# Altium PCB Volt_Metter_PCB.PcbDoc
Units mil, origin at the board's own origin, x right, y up, seen from the top; angles counter-clockwise.
Board outline 3976.41 x 2007.9 mil, 2 copper layers (Top Layer, Bottom Layer); 22 components, 21 nets, 99 pads, 6 vias.
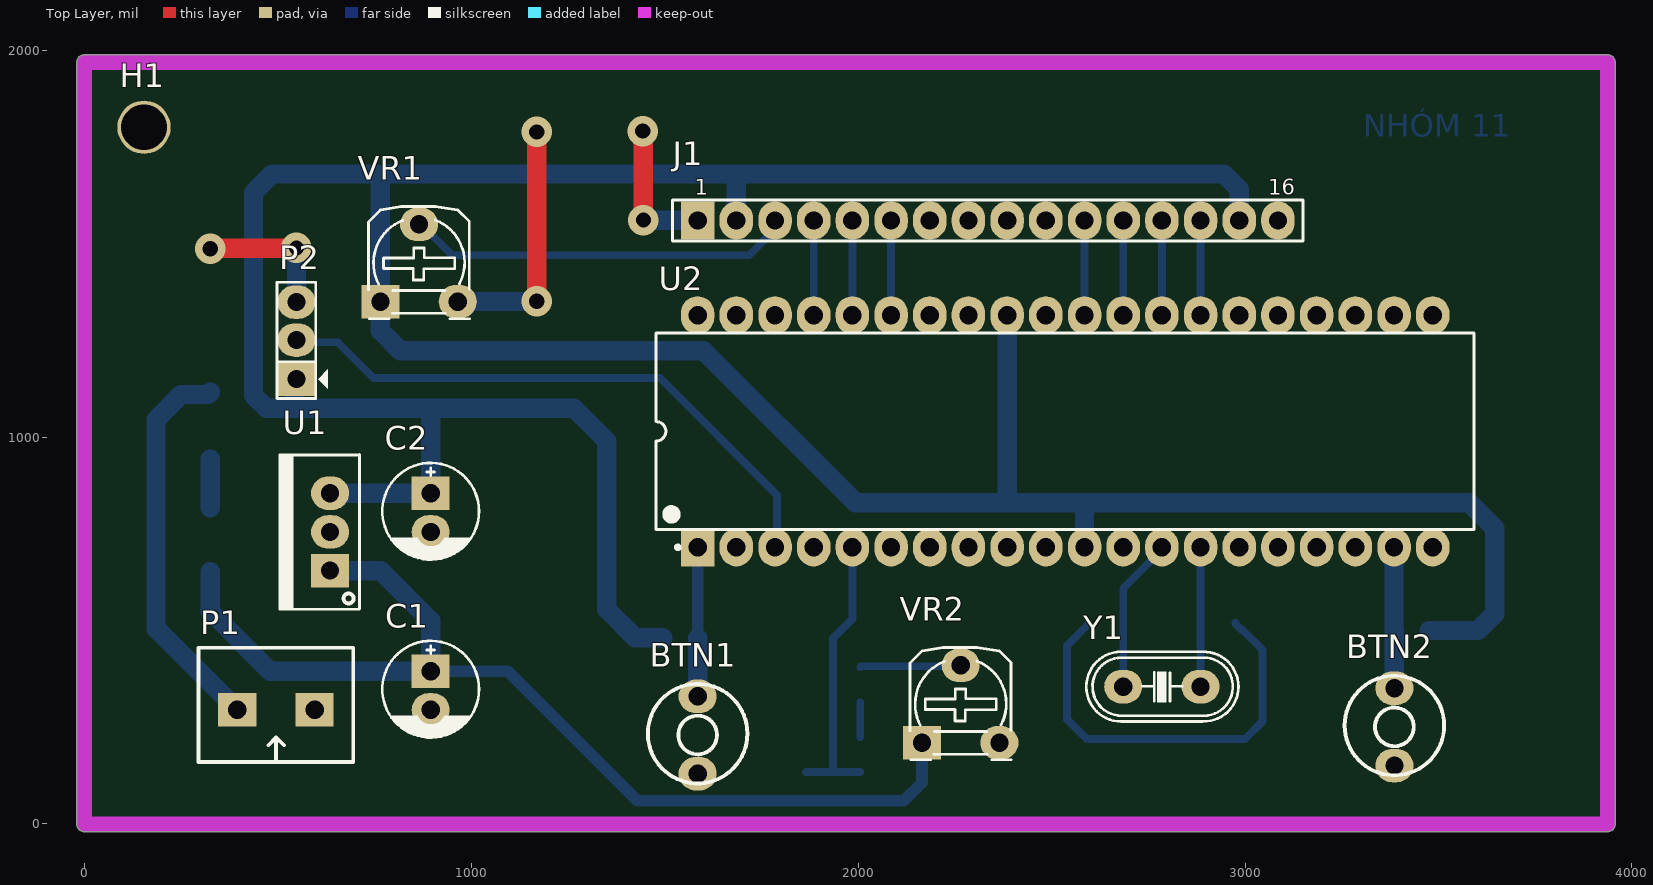
[diagram p0: Top Layer view]
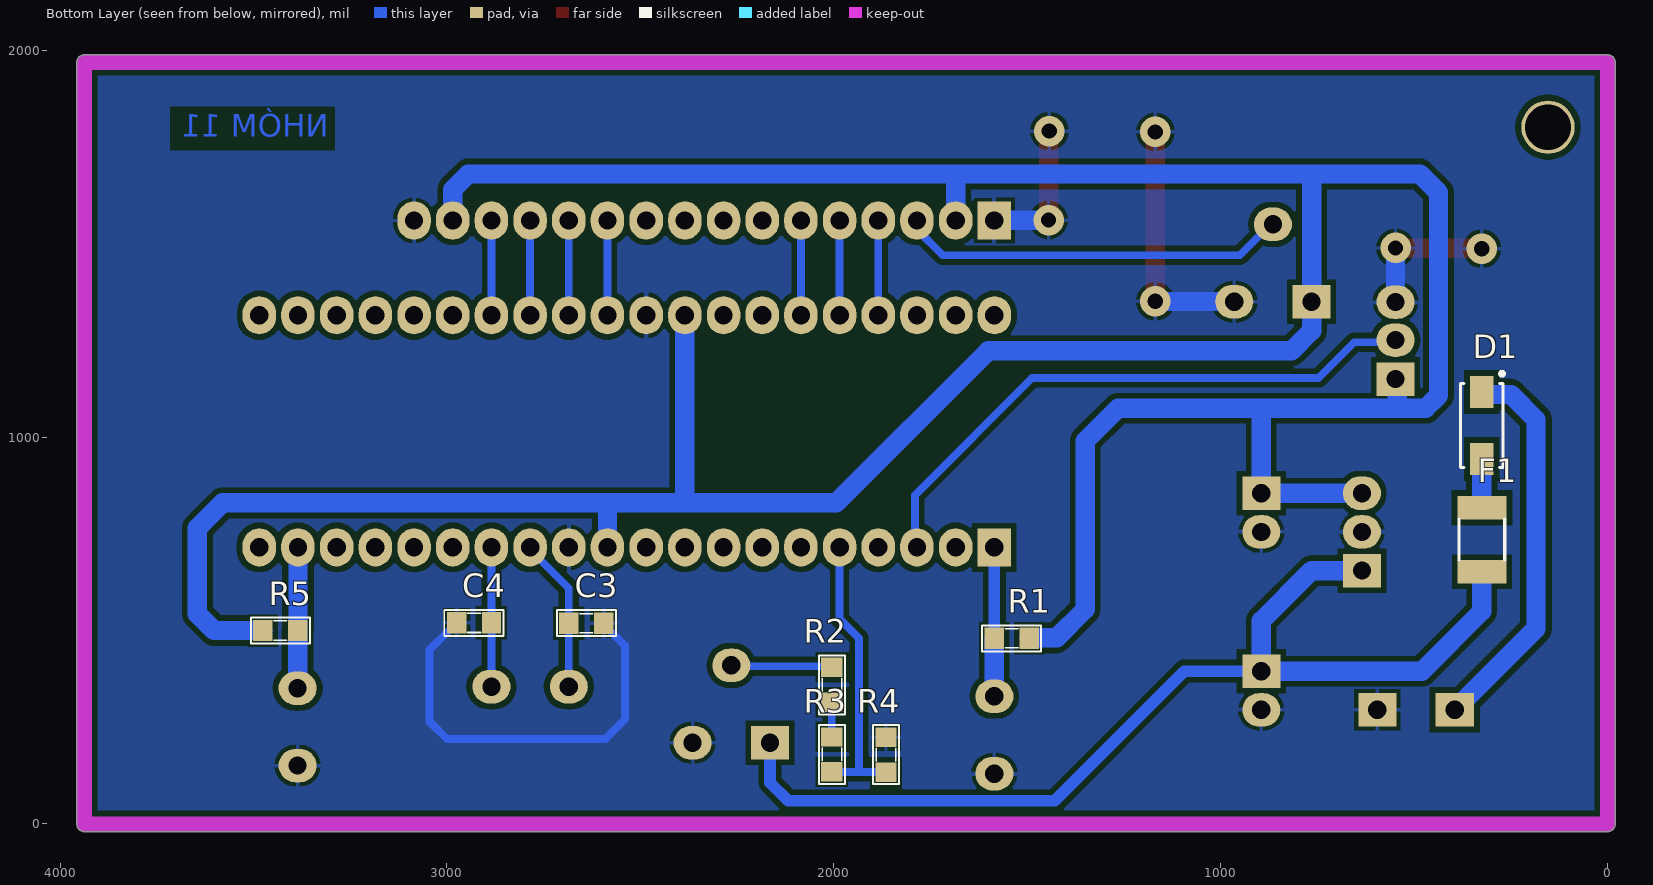
[diagram p1: Bottom Layer view, seen from below]
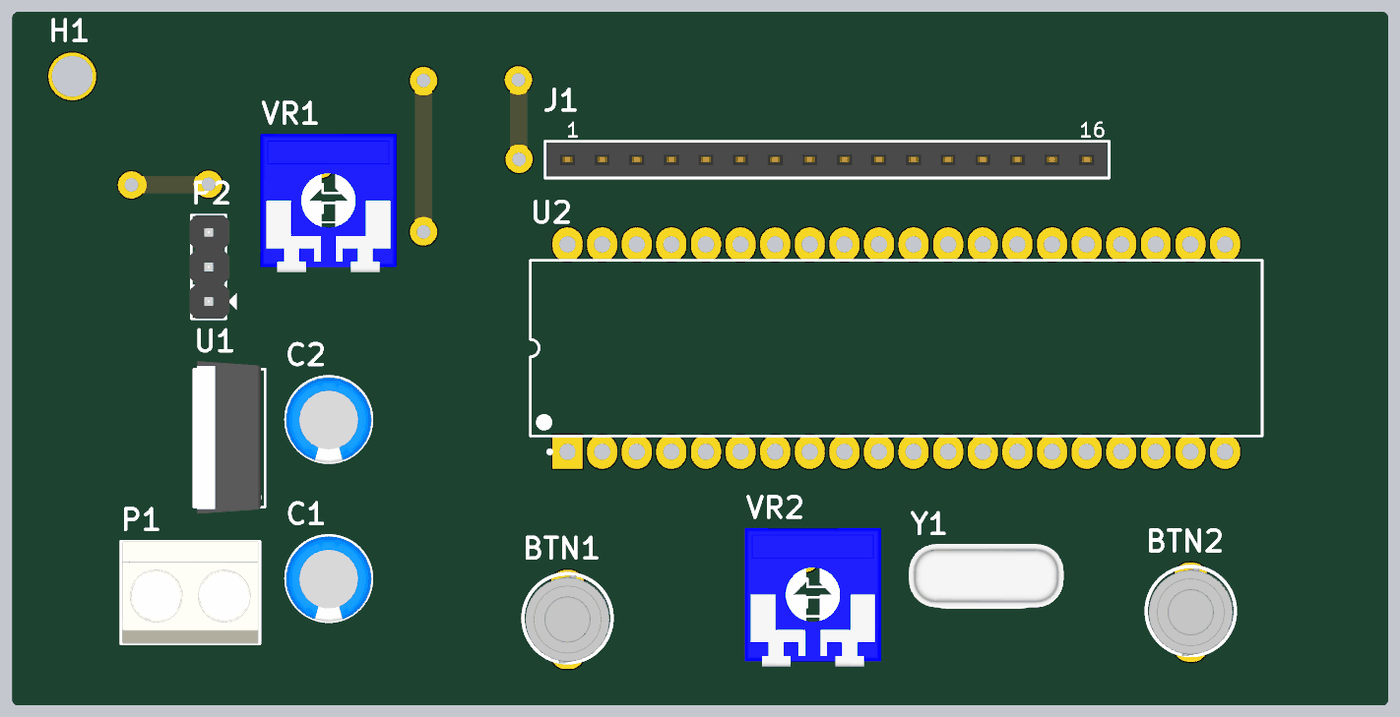
[diagram p2: 3D render of the assembled board from above, using the file's embedded part models]
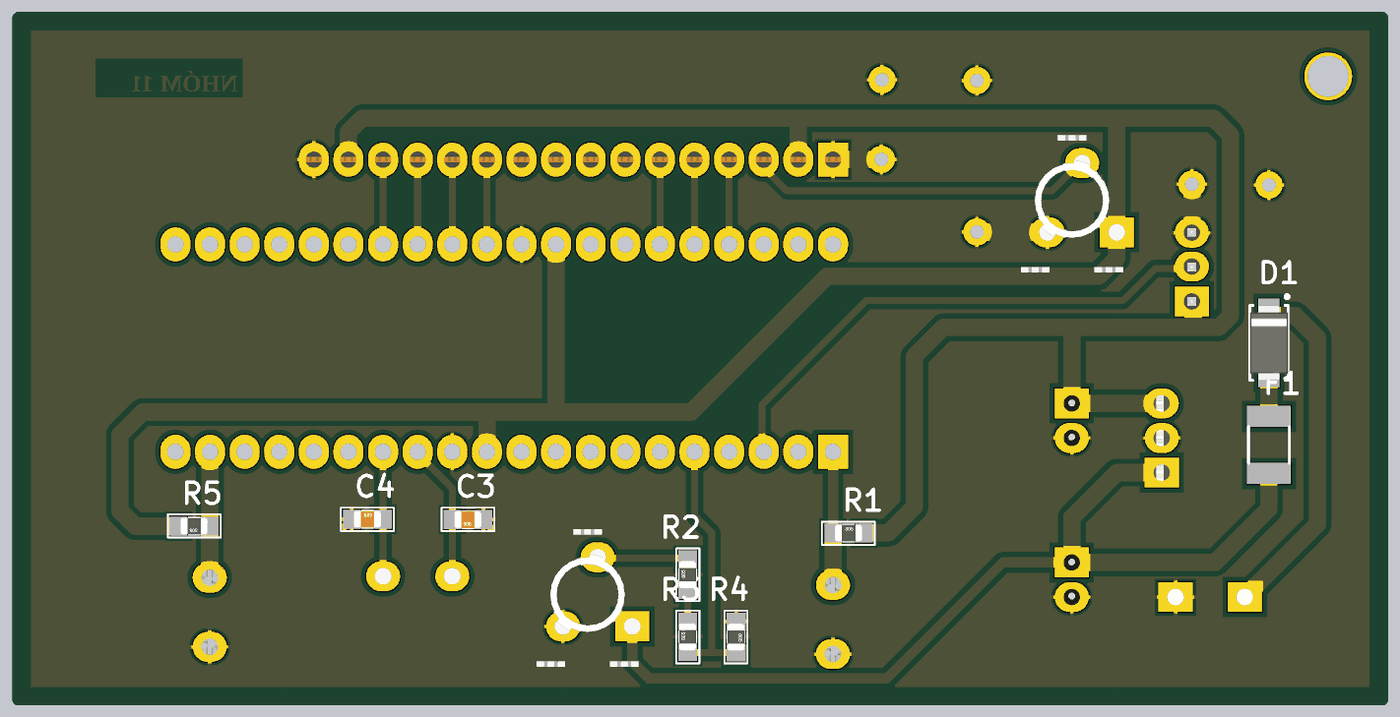
[diagram p3: 3D render of the assembled board from below, using the file's embedded part models]

## Layer stack, top to bottom
Top Solder: solder mask 0.4, Solder Resist, Dk 3.5
Top Layer: signal copper 1.4
Dielectric 1: dielectric 12.6, FR-4, Dk 4.8
Bottom Layer: signal copper 1.4
Bottom Solder: solder mask 0.4, Solder Resist, Dk 3.5

## Board outline
0,-19.7 cw(c0,0) -19.7,0 -19.7,1968.5 cw(c0,1968.5) 0,1988.2 3937.01,1988.2 cw(c3937.01,1968.5) 3956.71,1968.5 3956.71,0 cw(c3937.01,0) 3937.01,-19.7

## Design rules (kind name [scope] priority, off if disabled: settings)
Clearance [All] p1: gap=15 ignorepadtopadclearanceinfootprint=FALSE
PolygonConnect [All] p1: connectstyle=Relief reliefconductorwidth=10 reliefentries=4 polygonreliefangle="90 Angle" airgapwidth=10
RoutingVias [All] p1: holewidth=28 width=50 viastyle="Through Hole" minholewidth=39.37 minwidth=78.74 maxholewidth=28 maxwidth=50
SolderMaskExpansion [All] p1: expansion=4 istentingtop=FALSE
Width [All] p1: maxlimit=50 minlimit=20 preferedwidth=30
30 further rules are at their usual default settings.

## Components (designator, comment, footprint, x,y, rotation, side; value= is the part's Value field where it differs from the comment)
BTN1 "Button" Button 1590,230 r90 top
BTN2 "Button" Button 3391,251 r90 top
C1 "Cap Pol" CP1/2.5 895,395 r270 top value=10uF
C2 "Cap Pol" CP1/2.5 895,855 r270 top value=100nF
C3 "Cap Non-Pol SMD" CAP-SM-0805 2595,519 r0 bottom value=10uF
C4 "Cap Non-Pol SMD" CAP-SM-0805 2975,520 r180 bottom value=10uF
D1 "D Schottky" SS34 325,1030 r270 bottom
F1 "Fuse" "FUSE SMD" 325,735 r270 bottom
H1 "Hole" "LO KHOAN 3MM" 154,1801 r0 top
J1 "61301611821" 61301611821 2335,1560 r0 top
P1 "Domino 2" "DOMINO 2- 5mm" 495,295 r180 top
P2 "Header 3" JP3 548,1250 r90 top
R1 "Resistor 1/4W" RES-SM-0805 1585,480 r180 bottom value=10K
R2 "Resistor 1/4W" RES-SM-0805 2005,315 r90 bottom value=100K
R3 "Resistor 1/4W" RES-SM-0805 2005,135 r90 bottom value=10K
R4 "Resistor 1/4W" RES-SM-0805 1865,224 r270 bottom value=22K
R5 "Resistor 1/4W" RES-SM-0805 3386,500 r0 bottom value=10K
U1 "LM7805" QTO-220 635,655 r90 top
U2 "PIC16F877A-I/P" PDIP600-P40 2535,1015 r90 top
VR1 "10K" "Varistor 1" 765,1350 r0 top value="VR 10K"
VR2 "10K" "Varistor 1" 2165,210 r0 top value="VR 10K"
Y1 "20MHz" XT2 2785,355 r180 top

## Footprints (in the part's own frame and the unit in brackets; to place one, negate y for a bottom-side part, rotate by r counter-clockwise, add the part's x,y. Pads: shape width x height; smd on the part's side, far side on the other; paste and mask are expansions set on the pad)
61301611821 [mm] "Socket Header, Pitch 2.54 mm, THT, Vertical, single row, 16p"
  rect 2.2x2.5 hole 1.2: 1(-19.05,0)
  oval 2.2x2.5 hole 1.2: 2(-16.51,0) 3(-13.97,0) 4(-11.43,0) 5(-8.89,0) 6(-6.35,0) 7(-3.81,0) 8(-1.27,0) 9(1.27,0) 10(3.81,0) 11(6.35,0) 12(8.89,0) 13(11.43,0) 14(13.97,0) 15(16.51,0) 16(19.05,0)
  silkscreen extent -20.7,-1.35 20.7,1.35, body extent -20.57,-1.25 20.57,1.25, height 8.55
Button [mm] "Button"
  oval 2.2x2.5 hole 1.2: 1(-2.54,0.127) 2(2.54,0.127)
  silkscreen extent -3.17,-3.14 3.36,3.39, body extent -3.22,-2.97 3.23,3.23, height 4.3
CAP-SM-0805 [mil]
  rect 50x55 smd: 1(0,0) 2(90,0)
  silkscreen extent -32,-34 121,33, body extent 6,-25 84,25, height 31
CP1/2.5 [mm] "Tu hoa 33 >100 uF,50V, 220uF/16V,25V"
  rect 2.2x2.5 hole 1.2: 1(0,0)
  oval 2.2x2.5 hole 1.2: 2(2.54,0)
  silkscreen extent -1.99,-3.17 4.36,3.18, body extent -1.93,-3.15 4.37,3.15, height 10.71
"DOMINO 2- 5mm" [mm]
  rect 2.5x2.2 hole 1.2: 1(-2.54,0) 2(2.54,0)
  silkscreen extent -5.08,-4.08 5.08,3.43, body extent -5,-4.07 5,3.43, height 10
"FUSE SMD" [mm] "SMD FUSE"
  rect 1.55x3.21 smd: 1(-2.1,0) 2(2.1,0)
  silkscreen extent -1.35,-1.5 1.35,1.51, body extent -2.37,-1.71 2.36,1.71, height 0.75
JP3 [mm] "Jumper 3"
  rect 2.2x2.5 hole 1.2: 1(-2.54,0)
  oval 2.2x2.5 hole 1.2: 2(0.025,0) 3(2.515,0)
  silkscreen extent -3.81,-2.06 3.81,1.27, body extent -3.81,-1.52 3.81,1.4, height 9.02
"LO KHOAN 3MM" [mil]
  round 138 hole 118.1: 1(0,0)
PDIP600-P40 [mm] "DIP, 40-Pin, Row Spacing 15.24 mm, Pitch 2.54 mm"
  rect 2.5x2.2 hole 1.2: 1(-7.62,24.13)
  oval 2.5x2.2 hole 1.2: 2(-7.62,21.59) 3(-7.62,19.05) 4(-7.62,16.51) 5(-7.62,13.97) 6(-7.62,11.43) 7(-7.62,8.89) 8(-7.62,6.35) 9(-7.62,3.81) 10(-7.62,1.27) 11(-7.62,-1.27) 12(-7.62,-3.81) 13(-7.62,-6.35) 14(-7.62,-8.89) 15(-7.62,-11.43) 16(-7.62,-13.97) 17(-7.62,-16.51) 18(-7.62,-19.05) 19(-7.62,-21.59) 20(-7.62,-24.13) 21(7.62,-24.13) 22(7.62,-21.59) 23(7.62,-19.05) 24(7.62,-16.51) 25(7.62,-13.97) 26(7.62,-11.43) 27(7.62,-8.89) 28(7.62,-6.35) 29(7.62,-3.81) 30(7.62,-1.27) 31(7.62,1.27) 32(7.62,3.81) 33(7.62,6.35) 34(7.62,8.89) 35(7.62,11.43) 36(7.62,13.97) 37(7.62,16.51) 38(7.62,19.05) 39(7.62,21.59) 40(7.62,24.13)
  silkscreen extent -7.74,-26.85 6.45,26.85, body extent -7.3,-26.85 7.3,26.85, height 6.35
QTO-220 [mm] "TO-220 - 1-2-3"
  rect 2.2x2.5 hole 1.2: 1(0,0)
  oval 2.2x2.5 hole 1.2: 2(2.54,0) 3(5.08,0)
  silkscreen extent -2.54,-1.93 7.62,3.3, body extent -3.02,-1.63 8.19,3.06, height 19.17
RES-SM-0805 [mil]
  rect 50x55 smd: 1(0,0) 2(90,0)
  silkscreen extent -32,-34 121,33, body extent 6,-25 84,25, height 31
SS34 [mm] "DO-214-AC/SMA Molded Diode, Body 5.3x2.6mm, IPC Medium Density"
  rect 2.1x1.55 smd: 1(-2.2,0) 2(2.2,0)
  silkscreen extent -3.52,-1.4 2.75,1.45, body extent -2.75,-1.4 2.75,1.4, height 2.3
"Varistor 1" [mm] "Resistor Variable"
  rect 2.5x2.2 hole 1.2: 1(0,0)
  oval 2.5x2.2 hole 1.2: 2(2.54,5.08) 3(5.08,0)
  silkscreen extent -0.79,-1.12 5.87,6.25, body extent -1.72,-2.97 8.28,7.23, height 4.2
XT2 [mm] "Footpin for Crystal 2 pin"
  oval 2.5x2.2 hole 1.2: 1(-2.54,0) 2(2.54,0)
  silkscreen extent -5.03,-2.29 4.96,2.29, body extent -5.93,-2.36 5.42,2.29, height 3.5

## Part data
C1 C2: "Polarized Capacitor (Radial)"
C3 C4: "Capacitor"
D1: "Schottky Diode", Code_JEDEC=DO-214-AA, LatestRevisionDate=17-Jul-2002, LatestRevisionNote="Re-released for DXP Platform.", PackageDescription="DO-214-AA/SMB; 2 C-Bend Leads; Body 5.3 x 3.6 mm, inc. leads (LxW)", PackageReference=SMB, Published=8-Jun-2000, Publisher="Altium Limited"
H1: "Hole 3mm"
J1: "WR-PHD Socket Header, THT, pitch 2.54mm, Single Row, Vertical, 16p", Contact Resistance=20mOhm, Manufacturer="Wurth Elektronik", Operating Temperature="-40 to +125degC", Rated Current=3A, Withstanding Voltage=500VAC, Working Voltage=250VAC, ComponentLink1Description=Manufacturer, ComponentLink1URL=http://www.we-online.de, ComponentLink2Description=Datasheet, ComponentLink2URL=https://www.we-online.com/catalog/datasheet/61301611821.pdf, Gender="Socket Header", Manufacturer Part Number=61301611821, Mounting Technology=THT, Orientation=Vertical, Packaging=Tray, Pin Number=16, Pitch=2.54mm, Published Date="May 2020", Row Number=Single
P1: "Domino, 2-Pin", LatestRevisionDate=17-Jul-2002, LatestRevisionNote="Re-released for DXP Platform.", Publisher="Altium Limited"
P2: "Header, 3-Pin", LatestRevisionDate=17-Jul-2002, LatestRevisionNote="Re-released for DXP Platform.", Publisher="Altium Limited"
R1 R2 R3 R4 R5: library part RES
U1: "Positive Voltage Regulator"
U2: "Enhanced FLASH Microcontroller, 8K (x14-Bit words) FLASH, 368 Bytes RAM, 40-Pin PDIP, Standard VDD Range, Industrial Temperature", ComponentAvailability="Unknown. Contact manufacturer to determine status.", DatasheetVersion="revB, Oct-2003", PackageDescription="40-Lead Plastic Dual In-Line (P) - 600 mil Body [PDIP]", PackageReference=PDIP600-P40, PackageVersion="revBB, Aug-2009", PartNumber=PIC16F877A-I/P
VR1 VR2: library part "Var Resistor", "Var Resistor"
Y1: library part XTAL, "Crystal For all Crystal 2pin"

## Via types
v1: diameter 78.74, hole 39.37, Top Layer to Bottom Layer, 6 vias

## Nets (pads, with @x,y where several pads share a name; then routed paths per layer and width w, separated by ;. In a path a pad name is that pad's centre, name@x,y a point inside that pad or via, vN(x,y) a via of type N, cw(c..) or ccw(c..) an arc to the next point about the centre after c; other vN are vias at no path point)
5V: C2.1 J1.2 J1.15 P2.1 R1.2 R5.2 U1.3 U2.11 U2.32 VR1.1 | length 9954.1
  Bottom Layer w50: P2.1 544,1146 544,1075 ; U1.3 C2.1 895,1065 885,1075 ; R1.2 1495,481 1424,481 1350,555 1350,990 1265,1075 885,1075 ; J1.2 1685,1675 1680,1680 ; U2.32 2385,835 2390,830 ; U2.11 2585,830 ; J1.15 2985,1640 2945,1680 1680,1680 ; R5.2 3602,500 3645,543 3645,765 3580,830 2585,830 ; 544,1075 885,1075 ; 544,1075 470,1075 437,1108 437,1632 485,1680 760,1680 ; 760,1680 1680,1680 ; 760,1680 765,1675 VR1.1 765,1275 817,1223 1601,1223 1994,830 2390,830 ; 2390,830 2585,830
BTN_2: BTN2.2 R5.1 U2.19 | length 364.4
  Bottom Layer w50: U2.19 3385,503.5 3386,502.5 R5.1 BTN2.2
CURRENT_SENSOR: P2.2 U2.3 | length 1545.2
  Bottom Layer w20: P2.2 554,1245 655,1245 747,1153 1487,1153 1790,850 1790,720 U2.3
D4: J1.11 U2.30 | length 245
  Bottom Layer w20: U2.30 J1.11
D5: J1.12 U2.29 | length 245
  Bottom Layer w20: U2.29 J1.12
D6: J1.13 U2.28 | length 245
  Bottom Layer w20: U2.28 J1.13
D7: J1.14 U2.27 | length 245
  Bottom Layer w20: U2.27 J1.14
EN: J1.6 U2.35 | length 245
  Bottom Layer w20: U2.35 J1.6
GND: BTN1.1 BTN2.1 C1.2 C2.2 C3.1 C4.1 J1.1 J1.16 P1.1 P2.3 R4.1 U1.2 U2.12 U2.31 VR1.3 VR2.3 | length 2479.1
  Top Layer w50: v1(325,1487) 326,1488 547,1488 v1(548,1489) ; v1(1169,1351) v1(1169,1789) ; v1(1443,1791) 1444,1790 1444,1562 v1(1445,1561)
  Bottom Layer w20: C3.1 2595,516.5 2540,461.5 2540,270 2590,220 3000,220 3045,265 3045,450 2992.5,502.5 2990,502.5 2975,517.5 C4.1
  Bottom Layer w50: P2.3 v1(548,1489) ; VR1.3 965.5,1350.5 1168.5,1350.5 v1(1169,1351) ; v1(1445,1561) 1445.5,1560.5 1584.5,1560.5 J1.1
INPUT_VOLTAGE: R3.1 R4.2 U2.5 | length 741.6
  Bottom Layer w20: R4.2 1865.5,134.5 1935,134.5 ; U2.5 1985,530 1935,480 1935,134.5 ; R3.1 2004.5,134.5 1935,134.5
NetD1_1: D1.1 P1.2 | length 1010.8
  Bottom Layer w50: D1.1 325,1115.51 319.49,1110 250,1110 185,1045 185,505 370.79,319.21 370.79,313.31 389.09,295 P1.2
NetD1_2: D1.2 F1.1 | length 125.7
  Bottom Layer w50: F1.1 D1.2
NetJ1_3: J1.3 VR1.2 | length 1004.1
  Bottom Layer w20: VR1.2 870.91,1550 950.91,1470 1718.28,1470 1785,1536.72 J1.3
NetR2_1: R2.1 R3.2 | length 90
  Bottom Layer w20: R3.2 R2.1
NetR2_2: R2.2 VR2.2 | length 262.1
  Bottom Layer w20: R2.2 2007.5,407.5 2262.5,407.5 VR2.2
OSC1: C3.2 U2.13 Y1.2 | length 401.4
  Bottom Layer w20: Y1.2 C3.2 2685,609.09 2785,709.09 U2.13
OSC2: C4.2 U2.14 Y1.1 | length 360
  Bottom Layer w20: Y1.1 C4.2 U2.14
RS: J1.4 U2.37 | length 245
  Bottom Layer w20: U2.37 J1.4
RST: BTN1.2 R1.1 U2.1 | length 385
  Bottom Layer w30: R1.1 U2.1
  Bottom Layer w50: BTN1.2 R1.1
RW: J1.5 U2.36 | length 245
  Bottom Layer w20: U2.36 J1.5
VIN: C1.1 F1.2 U1.1 VR2.1 | length 2711.9
  Bottom Layer w30: C1.1 1094,395 1429.31,59.69 2117.69,59.69 2165,107 VR2.1
  Bottom Layer w50: F1.2 325,550 480,395 C1.1 895,525 765,655 U1.1
pads on no net: H1.1 J1.7 J1.8 J1.9 J1.10 U2.2 U2.4 U2.6 U2.7 U2.8 U2.9 U2.10 U2.15 U2.16 U2.17 U2.18 U2.20 U2.21 U2.22 U2.23 U2.24 U2.25 U2.26 U2.33 U2.34 U2.38 U2.39 U2.40

## Polygon pours and split planes (outlines as drawn)
GND on Bottom Layer "GND_L02_P000" (solid, remove dead copper, pour order 0): 0,-19.7 cw(c0,0) -19.7,0 -19.7,1968.5 cw(c0,1968.5) 0,1988.2 3937.01,1988.2 cw(c3937.01,1968.5) 3956.71,1968.5 3956.71,0 cw(c3937.01,0) 3937.01,-19.7

## Keep-outs
Keep-Out Layer:
  lines w39.37: 0,0 3937.01,0 3937.01,1968.5 0,1968.5 0,0

## Other copper
Bottom Layer:
  text "NHÓM 11" at 3305.51,1757.39 h100

## Text inside footprints (layer, text, board x,y; h text height)
J1: Top Overlay "16" at 3060.2,1626.93 h40; Top Overlay "1" at 1577.52,1626.93 h40